# Altium PCB Handheld Logger Bud HH3642 rev2.PcbDoc (part 1 of 2)
Units mil, origin at the board's own origin, x right, y up, seen from the top; angles counter-clockwise.
Board outline 2140 x 3050 mil, 2 copper layers (Top Layer, Bottom Layer); 81 components, 89 nets, 390 pads, 239 vias.
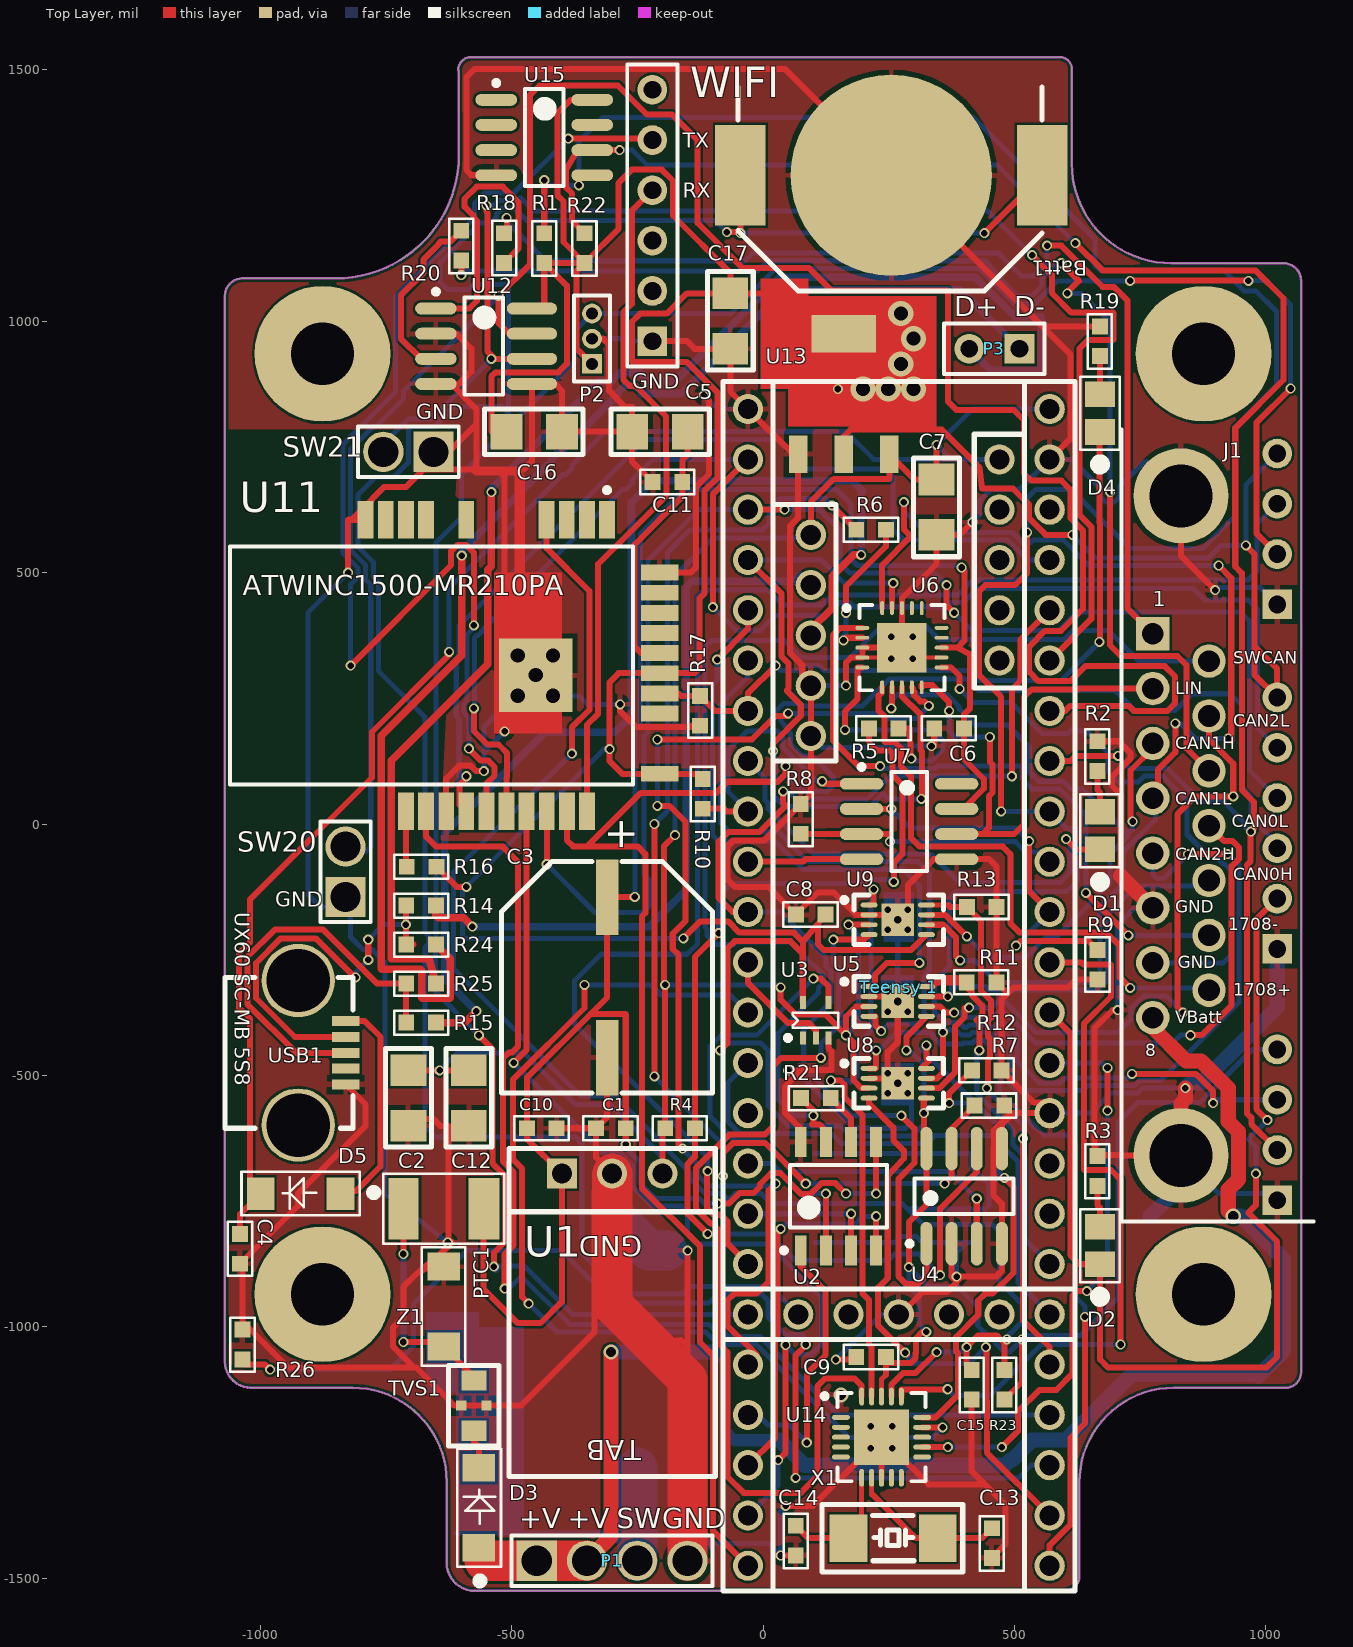
[diagram p0: Top Layer view]
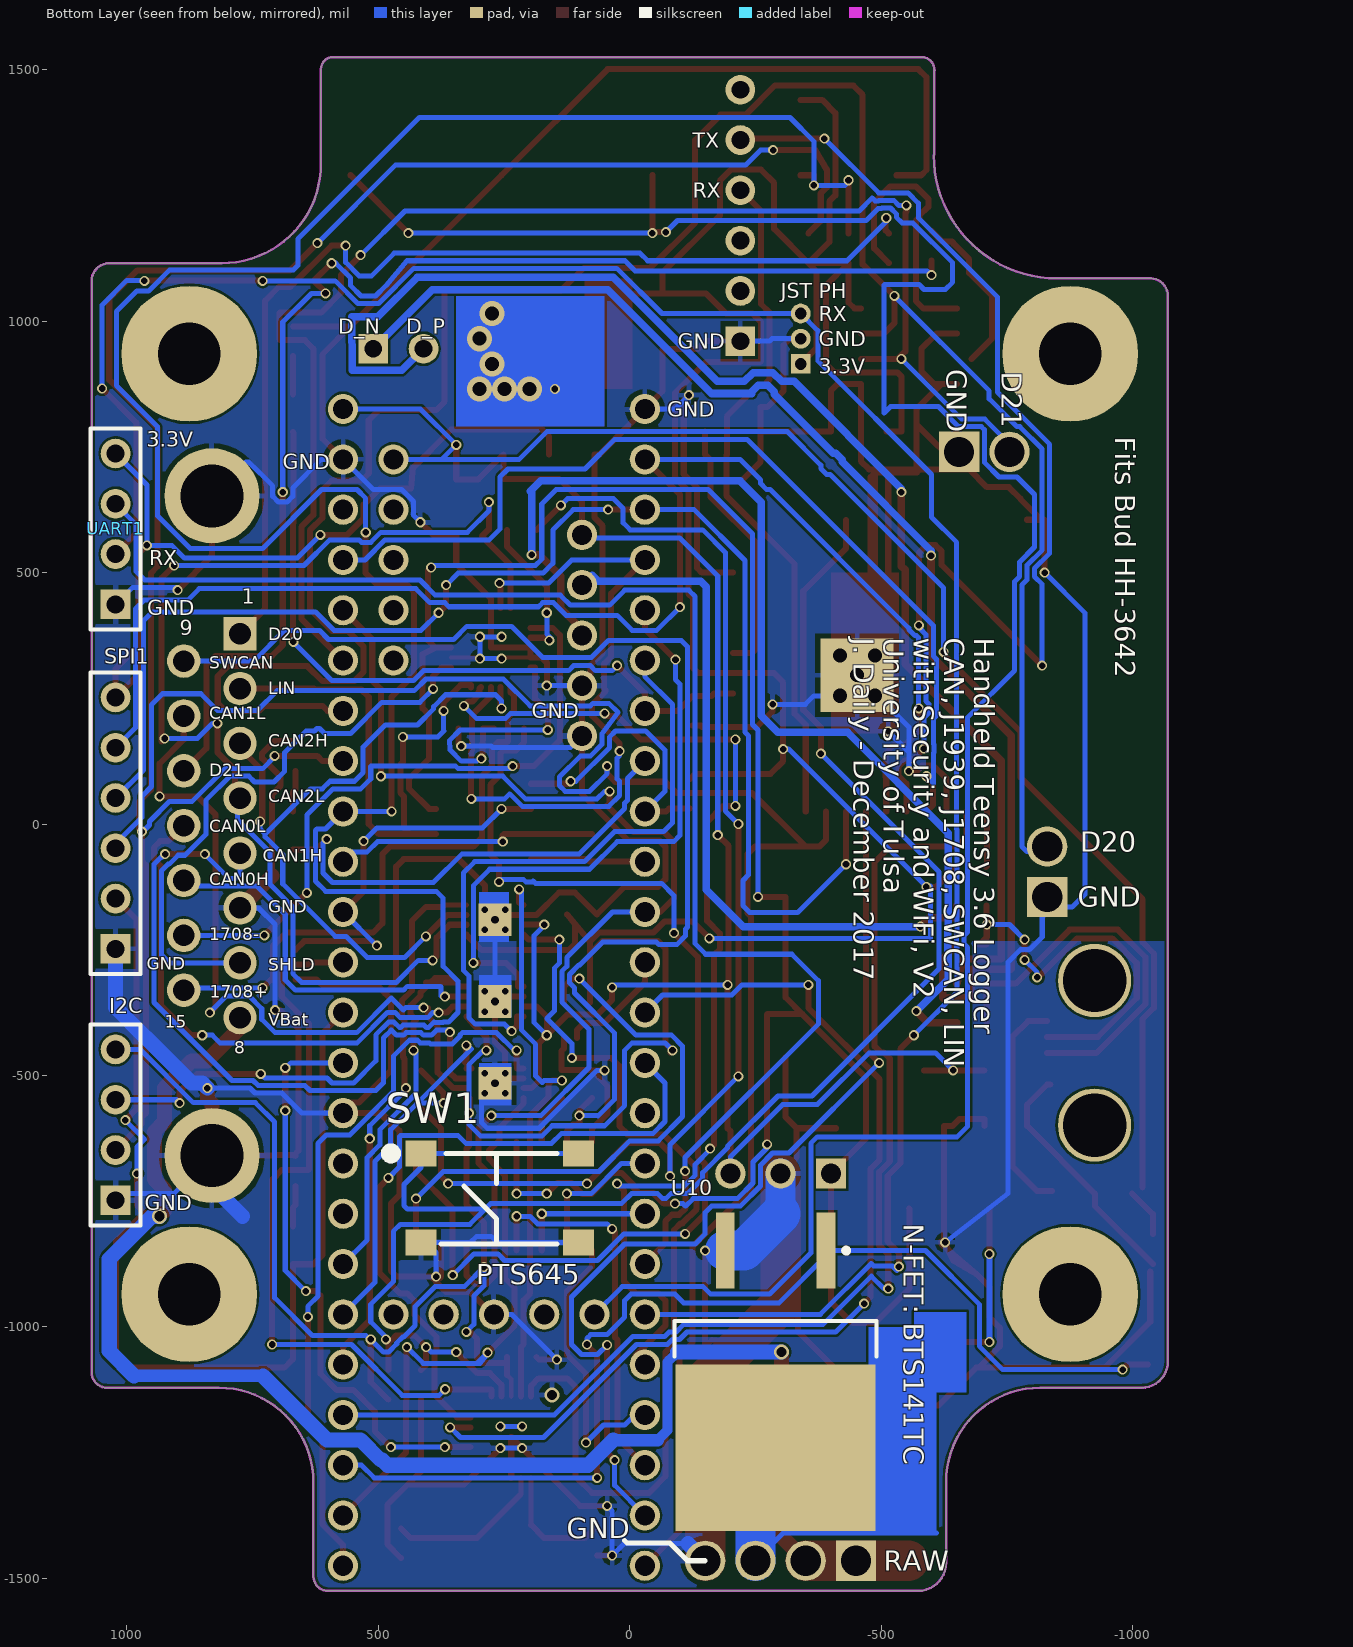
[diagram p1: Bottom Layer view, seen from below]

## Layer stack, top to bottom
Top Solder: solder mask 0.4, Solder Resist, Dk 3.5
Top Layer: signal copper 1.4
Dielectric 1: dielectric 12.6, FR-4, Dk 4.8
Bottom Layer: signal copper 1.4
Bottom Solder: solder mask 0.4, Solder Resist, Dk 3.5

## Board outline
-1018.02,-1121 -816.32,-1121 cw(c-816.32,-1308.32) -629,-1308.32 -629,-1469.09 ccw(c-573.09,-1469.09) -573.09,-1525 600,-1525 ccw(c600,-1496) 629,-1496 629,-1309 cw(c817,-1309) 817,-1121 1039,-1121 ccw(c1039,-1090) 1070,-1090 1070,1080 ccw(c1035,1080) 1035,1115 811.63,1115 cw(c811.63,1312.63) 614,1312.63 614,1501 ccw(c590,1501) 590,1525 -580,1525 ccw(c-580,1499) -606,1499 -605.24,1499.02 -605.09,1330.28 -604.64,1330.06 cw(c-849.7,1330.06) -849.7,1085 -1035,1085 ccw(c-1035,1050) -1070,1050 -1070,-1069.02 ccw(c-1018.02,-1069.02)

## Design rules (kind name [scope] priority, off if disabled: settings)
Clearance [All] p1: gap=5 ignorepadtopadclearanceinfootprint=FALSE
DiffPairsRouting [All] p1: maxlimit=10 minlimit=10 mostfreqgap=10 toplayer_minwidth=15 toplayer_maxwidth=15 toplayer_prefwidth=15 bottomlayer_minwidth=15 bottomlayer_maxwidth=15 bottomlayer_prefwidth=15 maxuncoupledlength=500
HoleSize [All] p1: absolutevalues=TRUE maxlimit=250 minlimit=13 maxpercent=80.000 minpercent=20.000
MinimumSolderMaskSliver [All] p1: minsoldermaskwidth=1
PolygonConnect [All] p1: connectstyle=Relief reliefconductorwidth=10 reliefentries=4 polygonreliefangle="90 Angle" airgapwidth=10
RoutingVias [All] p1: holewidth=13 width=20 viastyle="Through Hole" minholewidth=13 minwidth=20 maxholewidth=28 maxwidth=50
SMDNeckDown [All] p1: percent=200.000
SilkToSilkClearance [All] p1: silktosilkclearance=1
SilkToSolderMaskClearance [IsPad] p1: minsilkscreentomaskgap=1 clearancetoexposedcopper=TRUE
SolderMaskExpansion [All] p1: expansion=4
UnConnectedPin [All] p1 off:
Width [All] p1: maxlimit=120 minlimit=6 preferedwidth=12 bottomlayer_minwidth=10 bottomlayer_prefwidth=10 minimp=50.000000 maximp=50.000000 favimp=50.000000
25 further rules are at their usual default settings.

## Classes and differential pairs
component class "Teensy 3.6 with J1939 - Handheld Rev2": Batt1 C7 C9 C10 C13 C14 C15 D1 D2 D4 I2C P2 R2 R3 R8 R9 R10 R11 R12 R13 R18 R19 R20 R21 R23 SW1 SW20 SW21 "Teensy 1" U2 U5 U7 U8 U9 U12 U14 UART1 X1
component class "Additional Circuits - Handheld - Rev 2": C1 C2 C3 C4 C5 C6 C8 C11 C12 C16 C17 D3 D5 J1 P1 P3 PTC1 R1 R4 R5 R6 R7 R14 R15 R16 R17 R22 R24 R25 R26 SPI1 TVS1 U1 U3 U4 U6 U10 U11 U13 U15 USB1 WIFI Z1
differential pair "USB D": +"USB D_P" -"USB D_N"
differential pair "Hst USB": +"Hst USB_P" -"Hst USB_N"

## Components (designator, comment, footprint, x,y, rotation, side; value= is the part's Value field where it differs from the comment)
Batt1 "CR1225" "Battery Clip - CR1225" 255,1290 r180 top
C1 "0.1uF" 0603 -302.5,-605 r0 top
C2 "22uF" 1206 -705,-545 r90 top
C3 "100uF" "Elec. Cap - G" -310,-305 r90 top
C4 "10uF" 0603 -1040,-845 r270 top
C5 "10uF" 1206 -205,780 r0 top
C6 "0.1uF" 0603 370,190 r0 top
C7 "10uF" 1206 345,630 r270 top
C8 "0.1uF" 0603 95,-180 r0 top
C9 "0.1uF" 0603 215,-1060 r0 top
C10 "1uf" 0603 -440,-605 r0 top
C11 "0.1uF" 0603 -190,680 r0 top
C12 "22uF" 1206 -585,-545 r90 top
C13 "18pF" 0603 455,-1430 r90 top
C14 "18pF" 0603 65,-1425 r90 top
C15 "0.1uF" 0603 415,-1115 r90 top
C16 "22uF" 1206 -455,780 r180 top
C17 "22uF" 1206 -65,1000 r90 top
D1 "Green" "0805 Polarized" 670,-15 r90 top
D2 "Red" "0805 Polarized" 670,-840 r90 top
D3 "ACURA107-HF" "SMA with A and K" -565,-1439 r90 top
D4 "Yellow" "0805 Polarized" 670,815 r90 top
D5 "ACURA107-HF" "SMA with A and K" -840,-735 r180 top
I2C "Header 4" HDR1X4#1 1022.44,-748.31 r90 bottom
J1 "Vehicle Interface Cable Connector" DSUB1.385-2H15 1204.92,-3.31 r270 top locked
P1 "Header 4" HDR1X4#2 -450,-1465 r0 top
P2 "DNP GP-20U7 JST Header" MHDR1X3 -340,915 r90 top
P3 "Header 2" HDR1X2#1 510,945 r180 top
PTC1 "PTC RESTTBLE 0.75A" 1812 -635,-765 r0 top
R1 "4.7k" 0603 -435,1145 r90 top
R2 "330" 0603 665,135 r90 top
R3 "330" 0603 665,-690 r90 top
R4 "4.7k" 0603 -165,-605 r0 top
R5 "47" 0603 240,190 r0 top
R6 "47" 0603 215,585 r0 top
R7 "4.7k" 0603 450,-560 r0 top
R8 "100k" 0603 75,10 r90 top
R9 "100k" 0603 665,-280 r270 top
R10 "4.7k" 0603 -120,60 r90 top
R11 "100k" 0603 434.53,-315 r0 top
R12 "100k" 0603 445,-490 r0 top
R13 "100k" 0603 435,-165 r0 top
R14 "DNP" 0603 -680,-162.34 r180 top
R15 "DNP" 0603 -680,-395 r180 top
R16 "100k" 0603 -678.85,-85 r0 top
R17 "100k" 0603 -125,225 r270 top
R18 "330" 0603 -515,1145 r270 top
R19 "330" 0603 670,960 r90 top
R20 "330" 0603 -600,1150 r90 top
R21 "4.7k" 0603 105,-545 r180 top
R22 "4.7k" 0603 -355,1145 r90 top
R23 "100k" 0603 480,-1115 r90 top
R24 "47" 0603 -680,-239.89 r180 top
R25 "47" 0603 -680,-317.44 r180 top
R26 "100k" 0603 -1035,-1035 r90 top
SPI1 "Header 6" HDR1X6 1022.44,-248.31 r90 bottom
SW1 "PTS645" "Switch PTS645" 415,-655 r180 bottom
SW20 "Header 2" HDR1X2#2 -830,-145 r90 top
SW21 "Header 2" HDR1X2#2 -655,740 r180 top
"Teensy 1" "Teensy 3.6 Through Hole" "Teensy 3.6 Through Hole - No Labels" -30,-475 r0 top locked
TVS1 "Varistor 26V" Transfeed -575,-1206.5 r90 top
U1 "OKI-78SR" OKI-78SR -200,-695 r180 top locked
U2 "NCV7356D1R2G" ONSC-SOIC-8-751-07_V 150,-740 r90 top
U3 "74AHCT1G14" SOT-353 105,-390 r0 top
U4 "SN75HVD08DR" SOIC-SN8_N 400,-740 r90 top
U5 "MCP2558" TDFN 267.91,-352.97 r270 top
U6 "ADG1634BCPZ-REEL7" ADI-CP-20-4_N 276.26,350.63 r0 top locked
U7 "MCP2003A-E/SN" SOIC-SN8_N 290.51,5 r0 top
U8 "MCP2558" TDFN 267.91,-515.47 r270 top
U9 "MCP2558" TDFN 267.91,-190.47 r270 top
U10 "BTS141TC" INF-PG-TO263-3-2_N -290,-1088.43 r270 bottom
U11 "ATML-ATWINC1500-MR210PA-28" ATML-ATWINC1500-MR210PA-28_V -497.68,314.96 r270 top locked
U12 "MOCD207R2M" SOIC-8#1 -555,950 r0 top
U13 "NCP1117LPST33" SOT-223 70,735 r0 top
U14 "MCP2515-E/ML" QFN-ML20_M 235.63,-1219.29 r0 top
U15 "ATECC508A" SOIC-8#2 -435,1365 r0 top
UART1 "Header 4" HDR1X4#1 1022.44,436.69 r90 bottom
USB1 "UX60SC-MB-5S8" "USB Mini UX60S" -1070,-455 r270 top
WIFI "DNP" HDR1X6 -220,960 r90 top
X1 "16MHz" "XTAL 2 pad" 347.17,-1420 r180 top
Z1 "SMA6J" SMA -635,-880 r270 top

## Footprints (in the part's own frame and the unit in brackets; to place one, negate y for a bottom-side part, rotate by r counter-clockwise, add the part's x,y. Pads: shape width x height; smd on the part's side, far side on the other; paste and mask are expansions set on the pad)
0603 [mm] "0603 SMP Component with outline"
  rect 0.8x0.8 smd: 1(-0.75,0) 2(0.75,0)
  silkscreen extent -1.39,-0.61 1.36,0.61
"0805 Polarized" [mm] "Polarized 0805 with Pin 1 as Anode (+)"
  rect 1.3x1.5 smd: 1(-0.899,0) 2(1.001,0)
  silkscreen extent -2.79,-0.99 1.88,0.99
1206 [mm]
  rect 1.6x1.8 smd: 1(-1.4,0) 2(1.4,0)
  silkscreen extent -2.47,-1.16 2.5,1.15
1812 [mil] "Used for PTC Fuses from belfuse"
  rect 60x122 smd: 1(-80,0)
  rect 62x122 smd: 2(80,0)
  silkscreen extent -120,-70 120,70
ADI-CP-20-4_N [mm] "QFN, 20-Leads, Body 4x4mm, Pitch 0.5mm, Thermal Pad 2.5x2.5mm, IPC Medium Density"
  oval 0.7x0.2 smd: 1(-2,1) 2(-2,0.5) 3(-2,0) 4(-2,-0.5) 5(-2,-1) 11(2,-1) 12(2,-0.5) 13(2,0) 14(2,0.5) 15(2,1)
  oval 0.2x0.7 smd: 6(-1,-2) 7(-0.5,-2) 8(0,-2) 9(0.5,-2) 10(1,-2) 16(1,2) 17(0.5,2) 18(0,2) 19(-0.5,2) 20(-1,2)
  rect 2.5x2.5 smd: 21(0,0)
  silkscreen extent -2.92,-2.15 2.15,2.15, body extent -2,-2 2,2, height 1
ATML-ATWINC1500-MR210PA-28_V [mm] "Module, 28-Leads, Body 21.72x14.73mm, Pitch 1.016mm"
  rect 1.9x0.8 smd: 1(-7.365,4.761) 2(-7.365,3.745) 3(-7.365,2.729) 4(-7.365,1.713) 5(-7.365,-2.351) 6(-7.365,-4.383) 7(-7.365,-5.399) 8(-7.365,-6.415) 9(-7.365,-7.431) 10(7.365,-5.393) 11(7.365,-4.377) 12(7.365,-3.361) 13(7.365,-2.345) 14(7.365,-1.329) 15(7.365,-0.313) 16(7.365,0.703) 17(7.365,1.719) 18(7.365,2.735) 19(7.365,3.751)
  rect 0.8x1.9 smd: 20(5.465,7.431) 21(2.417,7.431) 22(1.401,7.431) 23(0.385,7.431) 24(-0.631,7.431) 25(-1.647,7.431) 26(-2.663,7.431) 27(-3.679,7.431) 28(-4.695,7.431)
  rect 3.7x3.7 hole 0.711: 29(0.485,1.161)
  silkscreen extent -8.99,-14.29 6.01,6.08, body extent -7.36,-14.29 7.36,7.43, height 3.35
"Battery Clip - CR1225" [mil] "Battery Holder Outlline for CR2032"
  rect 100x200 smd: 1(-300,0) 1(300,0)
  round 400 smd: 2(0,0)
  silkscreen extent -300,-175 305,230
DSUB1.385-2H15 [mm] "Connector; D Subminiature; 15 Position; Right Angle; Pitch 1.385 mm"
  rect 1.69x1.69 hole 1.09: 1(-9.695,-10.92)
  round 1.69 hole 1.09: 2(-6.925,-10.92) 3(-4.155,-10.92) 4(-1.385,-10.92) 5(1.385,-10.92) 6(4.155,-10.92) 7(6.925,-10.92) 8(9.695,-10.92) 9(-8.31,-8.08) 10(-5.54,-8.08) 11(-2.77,-8.08) 12(0,-8.08) 13(2.77,-8.08) 14(5.54,-8.08) 15(8.31,-8.08)
  round 4.8 hole 3.18: 16(-16.66,-9.5) 17(16.66,-9.5)
  silkscreen extent -20,-12.5 20,-2.79
"Elec. Cap - G" [mil] "Panasonic Style Electrolytic capacitor, Can size G, 10mm diameter"
  rect 150x45 smd: 1(159.45,0) 2(-159.45,0)
  silkscreen extent -229,-210 231,210
HDR1X2#1 [mm] "Connector; Header; 2 Position"
  rect 1.5x1.5 hole 0.9: 1(0,0)
  round 1.5 hole 0.9: 2(2.54,0)
  silkscreen extent -1.27,-1.27 3.81,1.27
HDR1X2#2 [mm] "Connector; Header; 2 Position"
  rect 2.032x2.032 hole 1.524: 1(0,0)
  round 2.032 hole 1.524: 2(2.54,0)
  silkscreen extent -1.27,-1.27 3.81,1.27
HDR1X4#1 [mm] "Connector; Header; 4 Position"
  rect 1.5x1.5 hole 0.9: 1(0,0)
  round 1.5 hole 0.9: 2(2.54,0) 3(5.08,0) 4(7.62,0)
  silkscreen extent -1.27,-1.27 8.89,1.27
HDR1X4#2 [mm] "Connector; Header; 4 Position"
  rect 2.032x2.032 hole 1.524: 1(0,0)
  round 2.032 hole 1.524: 2(2.54,0) 3(5.08,0) 4(7.62,0)
  silkscreen extent -1.27,-1.27 8.89,1.27
HDR1X6 [mm] "Connector; Header; 6 Position"
  rect 1.5x1.5 hole 0.9: 1(0,0)
  round 1.5 hole 0.9: 2(2.54,0) 3(5.08,0) 4(7.62,0) 5(10.16,0) 6(12.7,0)
  silkscreen extent -1.27,-1.27 13.97,1.27
INF-PG-TO263-3-2_N [mm] "DPAK, 3-Leads, Body 10x9.25mm, Pitch 2.54mm, IPC Medium Density"
  rect 3.85x0.95 smd: 1(-6.1,2.54) 3(-6.1,-2.54)
  rect 8.4x10.1 smd: 2(3.85,0)
  silkscreen extent -6.22,-5.1 -0.75,5.1, body extent -2.55,-5.1 6.9,5.1, height 4.4
MHDR1X3 [mm] "Connector; Header; 3 Position"
  rect 1x1 hole 0.6: 1(0,0)
  round 1 hole 0.6: 2(1.27,0) 3(2.54,0)
  silkscreen extent -0.9,-0.9 3.44,0.9
OKI-78SR [mil] "Horizontal Mount SIP DC/DC Converter"
  rect 60x60 hole 40: 1(200,0)
  round 60 hole 40: 2(100,0) 3(0,0)
  silkscreen extent -105,-50 305,602
ONSC-SOIC-8-751-07_V [mm] "SOIC, 8-Leads, Body 4.9x3.9mm, Pitch 1.27mm"
  rect 1.52x0.6 smd: 1(-2.74,1.905) 2(-2.74,0.635) 3(-2.74,-0.635) 4(-2.74,-1.905) 5(2.74,-1.905) 6(2.74,-0.635) 7(2.74,0.635) 8(2.74,1.905)
  silkscreen extent -2.86,-2.45 1.58,2.88, body extent -1.95,-2.45 1.95,2.45, height 1.75
QFN-ML20_M [mm] "QFN, 20-Leads, Body 4x4mm, Pitch 0.5mm, Thermal Pad 2.8x2.8mm, IPC Low Density"
  oval 0.9x0.25 smd: 1(-2.05,1) 2(-2.05,0.5) 3(-2.05,0) 4(-2.05,-0.5) 5(-2.05,-1) 11(2.05,-1) 12(2.05,-0.5) 13(2.05,0) 14(2.05,0.5) 15(2.05,1)
  oval 0.25x0.9 smd: 6(-1,-2.05) 7(-0.5,-2.05) 8(0,-2.05) 9(0.5,-2.05) 10(1,-2.05) 16(1,2.05) 17(0.5,2.05) 18(0,2.05) 19(-0.5,2.05) 20(-1,2.05)
  rect 2.8x2.8 smd: 21(0,0)
  silkscreen extent -3,-2.23 2.22,2.23, body extent -2.06,-2.09 2.09,2.06, height 1
SMA [mil] "SMA with outline"
  rect 55x65 smd: 1(0,0) 2(159,0)
  silkscreen extent -38,-44 197,43
"SMA with A and K" [mil] "SMA with outline and Cathode Bar on Pin 2"
  rect 55x65 smd: 1(0,0) 2(159,0)
  silkscreen extent -71,-44 197,43
SOIC-8#1 [mm]
  oval 2.1x0.6 smd: 1(-2.425,1.905) 2(-2.425,0.635) 3(-2.425,-0.635) 4(-2.425,-1.905)
  oval 2.54x0.6 smd: 5(2.425,-1.905) 6(2.425,-0.635) 7(2.425,0.635) 8(2.425,1.905)
  silkscreen extent -2.55,-2.45 0.98,2.88
SOIC-8#2 [mm]
  oval 2.1x0.6 smd: 1(-2.425,1.905) 2(-2.425,0.635) 3(-2.425,-0.635) 4(-2.425,-1.905) 5(2.425,-1.905) 6(2.425,-0.635) 7(2.425,0.635) 8(2.425,1.905)
  silkscreen extent -2.55,-2.45 0.98,2.88
SOIC-SN8_N [mm] "SOIC, 8-Leads, Body 4.9x3.8mm, Pitch 1.27mm, IPC Medium Density"
  oval 2.2x0.6 smd: 1(-2.4,1.905) 2(-2.4,0.635) 3(-2.4,-0.635) 4(-2.4,-1.905) 5(2.4,-1.905) 6(2.4,-0.635) 7(2.4,0.635) 8(2.4,1.905)
  silkscreen extent -2.52,-2.5 0.9,2.88, body extent -2,-2.5 2,2.5, height 1.75
SOT-223 [mm]
  rect 0.95x1.9 smd: 1(0,0) 2(2.3,0) 3(4.6,0)
  rect 3.25x1.9 smd: 4(2.3,6.1)
SOT-353 [mil]
  rect 12x26 smd: 1(-25.59,-35.43) 2(0,-35.43) 3(25.59,-35.43) 4(25.59,35.43) 6(-25.59,35.43)
  silkscreen extent -61,-40 44,15
"Switch PTS645" [mm]
  rect 1.55x1.3 smd: 1(0,0) 2(7.95,0) 3(0,-4.5) 4(7.95,-4.5)
  silkscreen extent -1.78,-4.57 6.86,0.25
TDFN [mm] "8-Lead Plastic Dual Flat, No Lead Package (MN) – 2x3x0.75mm Body [TDFN]"
  rect 1.651x1.651 hole 0.381: 0(0,0)
  oval 0.25x0.85 smd: 1(-0.75,-1.45) 2(-0.25,-1.45) 3(0.25,-1.45) 4(0.75,-1.45) 5(0.75,1.45) 6(0.25,1.45) 7(-0.25,1.45) 8(-0.75,1.45)
  silkscreen extent -1.25,-2.83 1.25,2.3
"Teensy 3.6 Through Hole - No Labels" [mil] "32 bit Arduino Compatible Microcontroller www.pjrc.com/teensy"
  round 60 hole 40: 0(500,1100) 1(0,0) 2(0,100) 3(0,200) 4(0,300) 5(0,400) 6(0,500) 7(0,600) 8(0,700) 9(0,800) 10(0,900) 11(0,1000) 12(0,1100) 13(0,1200) 14(0,1300) 15(100,-500) 16(0,-100) 17(300,-500) 18(400,-500) 19(600,-300) 20(600,0) 21(600,100) 22(600,200) 23(600,300) 24(600,400) 25(600,500) 26(600,600) 27(600,700) 28(600,800) 29(600,900) 30(600,1000) 31(600,1100) 32(600,1200) 33(600,1300) 34(500,1200) 35(500,1000) 36(500,900) 37(500,800) 38(0,-200) 39(0,-300) 40(0,-400) 41(0,-500) 42(0,-600) 43(0,-700) 44(0,-800) 45(0,-900) 46(0,-1000) 47(600,-1000) 48(600,-900) 49(600,-600) 50(600,-500) 51(600,-400) 61(600,-200) 62(600,-800) 63(600,-700) 75(125,1050) 76(125,950) 77(125,850) 78(125,750) 79(125,650) 88(500,-500) 90(600,-100) 91(200,-500)
  silkscreen extent -50,-1050 650,1355
Transfeed [mil] "AVX Multilayer Ceramic Transient Voltage Suppressors"
  rect 40x50 smd: 1(0,0) 2(100,0)
  rect 20x20 smd: 3(50,-25) 3(50,25)
  silkscreen extent -30,-50 130,50
"USB Mini UX60S" [mm] "Receptacle - Standard - Shell through Hole"
  round 3.7 hole 3.2: 0(-3.65,3.7) 0(3.65,3.7)
  rect 0.5x1.4 smd: 1(-1.6,6.1) 2(-0.8,6.1) 3(0,6.1) 4(1.6,6.1) 5(0.8,6.1)
  silkscreen extent -3.81,0 3.81,6.48
"XTAL 2 pad" [mm] "Digikey XC1659CT-ND"
  rect 1.9x2.4 smd: 1(0,0) 2(4.5,0)
  silkscreen extent -1.27,-1.7 5.84,1.7

## Part data
Batt1: library part "CR2032 Battery Holder", "Lithium Battery Non-Rechargeable (Primary) 3V Coin, 12.5mm", Manufacturer=Linx, PartNumber=BAT-HLD-012-SMT, Supplier Part Number 1=BAT-HLD-012-SMT-ND, Supplier 1=Digi-Key
C1 C9 C11: library part Cap, "CAP CER 0.1UF 50V X7R 0603", Manufacturer="Murata Electronics North America", PartNumber=GRM188R71H104KA93D, Supplier Part Number 1=490-1519-1-ND, Supplier 1=Digi-Key
C2 C12 C16 C17: library part Cap, "22µF ±20% 25V Ceramic Capacitor X5R 1206 (3216 Metric)", Manufacturer="Murata Electronics North America", PartNumber=GRT31CR61E226ME01L, Supplier Part Number 1=490-12451-1-ND, Supplier 1=Digi-Key
C3: library part "Tantalum Cap_1", "Aluminum Electrolytic Capacitors Radial, Can - SMD 5000 Hrs @ 105°C", Manufacturer="Panasonic Electronic Components", PartNumber=EEE-HC1H101P, Supplier Part Number 1=P19732CT-ND, Supplier 1=Digi-Key
C4: library part Cap, "10µF ±20% 25V Ceramic Capacitor X5R 0603 (1608 Metric)", Manufacturer="Murata Electronics North America", PartNumber=GRT188R61E106ME13D, Supplier Part Number 1=490-12323-1-ND, Supplier 1=Digi-Key
C5 C7: library part Cap, "10µF ±20% 50V Ceramic Capacitor X5R 1206 (3216 Metric)", Manufacturer="Murata Electronics North America", PartNumber=GRT31CR61H106ME01L, Supplier Part Number 1=490-12457-1-ND, Supplier 1=Digi-Key
C6 C8 C15: library part Cap, "CAP CER 0.1UF 50V 10% X7R 0603", Manufacturer="Murata Electronics North America", PartNumber=GRM188R71H104KA93D, Supplier Part Number 1=490-1519-1-ND, Supplier 1=Digi-Key
C10: library part Cap, "1µF ±20% 50V Ceramic Capacitor X5R 0603 (1608 Metric)", Manufacturer="Murata Electronics North America", PartNumber=GRT188R61H105ME13D, Supplier Part Number 1=490-12331-1-ND, Supplier 1=Digi-Key
C13 C14: library part Cap, "CAP CER 18PF 50V 5% NP0 0603", Manufacturer=Kemet, PartNumber=C0603C180J5GACTU, Supplier Part Number 1=399-1052-1-ND, Supplier 1=Digi-Key
D1: library part "LED - SMD", "LED GREEN DIFFUSED 0805 SMD", Manufacturer="OSRAM Opto Semiconductors Inc.", PartNumber="LG R971-KN-1", Supplier Part Number 1=475-1410-1-ND, Supplier 1=Digi-Key
D2: library part "LED - SMD", "LED RED DIFFUSED 0805 SMD", Manufacturer="OSRAM Opto Semiconductors Inc.", PartNumber="LS R976-NR-1", Supplier Part Number 1=475-1278-1-ND, Supplier 1=Digi-Key
D3 D5: library part "Schottky Diode", "Diode Schottky 1000V 1A Surface Mount DO-214AC (SMA)", Manufacturer="Comchip Technology", Supplier Part Number 1=641-1884-1-ND, PartNumber=ACURA107-HF, Supplier 1=Digi-Key
D4: library part "LED - SMD", "LED YELLOW DIFFUSED 0805 SMD", Manufacturer="OSRAM Opto Semiconductors Inc.", PartNumber="LY R976-PS-36", Supplier Part Number 1=475-2560-1-ND, Supplier 1=Digi-Key
I2C P1 UART1: "Header, 4-Pin"
J1: library part "D Connector 15", "Receptacle Assembly, 15 Position, Right Angle", Manufacturer="Amphenol FCI", PartNumber=D15S33E4GV00LF, Supplier Part Number 1=609-1498-ND, Supplier 1=Digi-Key
P2: library part MHDR1X3, "CONN HEADER PH SIDE 3POS 2MM SMD", Manufacturer=JST, PartNumber=S3B-PH-SM4-TB(LF)(SN), Supplier Part Number 1=455-1750-1-ND, Supplier 1=Digi-Key
P3 SW20 SW21: "Header, 2-Pin"
PTC1: library part PTC, "PTC RESTTBLE 0.75A 33V CHIP 1812", Manufacturer="Bel Fuse Inc.", PartNumber=0ZCG0075BF2B, Supplier Part Number 1=507-1765-1-ND, Supplier 1=Digi-Key
R1 R4 R7 R10 R21 R22: library part "Chip Resistor", "±1% 0.1W, 1/10W Chip Resistor 0603 (1608 Metric) Automotive AEC-Q200, High Voltage Thick Film", Manufacturer="Rohm Semiconductor", PartNumber=KTR03EZPF4701, Supplier Part Number 1=RHM4.7KAYCT-ND, Supplier 1=Digi-Key
R2 R3 R18 R19 R20: library part "Chip Resistor", "330 Ohms ±1% 0.1W, 1/10W Chip Resistor 0603 (1608 Metric) Automotive AEC-Q200, High Voltage Thick Film", Manufacturer="Rohm Semiconductor", PartNumber=KTR03EZPF3300, Supplier Part Number 1=RHM330AYCT-ND, Supplier 1=Digi-Key
R5 R6 R24 R25: library part "Chip Resistor", "±1% 0.1W, 1/10W Chip Resistor 0603 (1608 Metric) Automotive AEC-Q200, High Voltage Thick Film", Manufacturer="Rohm Semiconductor", PartNumber=KTR03EZPF47R0, Supplier Part Number 1=RHM47AYCT-ND, Supplier 1=Digi-Key
R8 R9 R11 R12 R13 R16 R17 R23 R26: library part "Chip Resistor", "±1% 0.1W, 1/10W Chip Resistor 0603 (1608 Metric) Automotive AEC-Q200, High Voltage Thick Film", Manufacturer="Rohm Semiconductor", PartNumber=KTR03EZPF1003, Supplier Part Number 1=RHM100KAYCT-ND, Supplier 1=Digi-Key
R14 R15: library part "Chip Resistor", "RES SMD 47 OHM 1% 1/10W 0603", Manufacturer="Panasonic Electronic Components", PartNumber=ERJ-3EKF47R0V, Supplier Part Number 1=P47.0HCT-ND, Supplier 1=Digi-Key
SPI1: "Header, 6-Pin"
SW1: library part "Switch - Tactile_1", "PTS645 Series  6 mm Tact Switches", Manufacturer="C & K Components", PartNumber="PTS645SM43SMTR92 LFS", Supplier Part Number 1=CKN9112CT-ND, Supplier 1=Digi-Key
"Teensy 1": "24 Position Header Connector 0.100\" (2.54mm) Through Hole Gold", Manufacturer="Sullins Connector Solutions", PartNumber=PPPC241LFBN-RC, Supplier Part Number 1=S7057-ND, Supplier 1=Digi-Key
TVS1: library part Transfeed, "34.5V 80A Varistor 1 Circuit Surface Mount 0805 (2012 Metric)", Manufacturer=AVX, PartNumber=V2AF126C600Y2EDP, Supplier Part Number 1=478-10038-1-ND, Supplier 1=Digi-Key
U1: library part 7805, "5V DC/DC Converter (7805 replacement)", Manufacturer="Murata Power Solutions Inc.", PartNumber=OKI-78SR-5/1.5-W36H-C, Supplier Part Number 1=811-2692-ND, Supplier 1=Digi-Key
U2: library part NCV7356D1G, "Single Wire CAN Transceiver, 5 to 27 V, 8-Pin SOIC, Pb-Free, Tube", Manufacturer="On Semiconductor", Supplier Part Number 1=NCV7356D1R2GOSCT-ND, PartNumber=NCV7356D1R2G, Supplier 1=Digi-Key
U3: library part "74AHCT1G14 Inverter", "IC SCHMIT-TRIGG INV GATE SOT353", Manufacturer="Diodes Incorporated", PartNumber=74AHCT1G14SE-7, Supplier Part Number 1=74AHCT1G14SE-7DICT-ND, Supplier 1=Digi-Key
U4: library part "SN75HVD12D (3.3v RS485)", "IC RS485 TXRX 3/5V 8-SOIC", Manufacturer="Texas Instruments", Supplier Part Number 1=296-37893-1-ND, PartNumber=SN75HVD08DR, Supplier 1=Digi-Key
U5 U8 U9: library part MCP2558FD, "Microchip CAN FD Transceiver with Silent Mode", Manufacturer=Microchip, PartNumber=MCP2558FDT-H/MNY, Supplier 1=Arrow, Supplier Part Number 1=MCP2558FDT-H/MNY
U6: "IC SWITCH QUAD SPDT 20LFCSP", Manufacturer="Analog Devices", Supplier Part Number 1=ADG1634BCPZ-REEL7CT-ND, PartNumber=ADG1634BCPZ-REEL7, Supplier 1=Digi-Key
U7: library part MCP2003AT-E/SN, "LIN J2602 Transceiver, 8-Pin SOIC, Extended Temperature, Tape and Reel", Manufacturer=Microchip, Supplier Part Number 1=MCP2003A-E/SN-ND, PartNumber=MCP2003A-E/SN, Supplier 1=Digi-Key
U10: "Smart Low-Side Power Switch HITFET, 60 V VDS, 12 A ID, -40 to 150 degC, PG-TO263-3-2, Reel, Green", Manufacturer=Infineon, Supplier Part Number 1=BTS141TCTR-ND, PartNumber=BTS141TC, Supplier 1=Digi-Key
U11: "SMARTCONNECT ATWINC1500B-MU-T MO", Manufacturer="Microchip Technologies", PartNumber=ATWINC1510-MR210PB1140, Supplier Part Number 1=ATWINC1510-MR210PB1140-ND, Supplier 1=Digi-Key
U12: library part "Optoisolator - Dual", "Optoisolator Transistor Output 2500Vrms 2 Channel 8-SO Tall", Manufacturer="Fairchild/ON Semiconductor", Supplier Part Number 1=MOCD207R2MCT-ND, PartNumber=MOCD207R2M, Supplier 1=Digi-Key
U13: library part "NCP1117 2.5V", "Linear Voltage Regulator IC Positive Fixed Output 3.3V 1A SOT-223", Manufacturer="On Semiconductor", PartNumber=NCP1117LPST33T3G, Supplier Part Number 1=NCP1117LPST33T3GOSCT-ND, Supplier 1=Digi-Key
U14: "CAN Controller CAN 2.0 SPI Interface 20-QFN (4x4)", Manufacturer=Microchip, Supplier Part Number 1=MCP2515-E/ML-ND, PartNumber=MCP2515-E/ML, Supplier 1=Digi-Key
U15: "Authentication Chip IC Networking and Communications 8-SOIC", Manufacturer="Microchip Technology", PartNumber=ATECC508A-SSHDA-T, Supplier Part Number 1=ATECC508A-SSHDA-TCT-ND, Supplier 1=Digi-Key
USB1: library part USB-Rugged, "USB - mini B USB 2.0 Receptacle Connector 5 Position Surface Mount, Right Angle; Through Hole", Manufacturer=Hirose, Supplier Part Number 1=H11589CT-ND, PartNumber=UX60SC-MB-5S8, Supplier 1=Digi-Key
WIFI: library part "Header 6", "CONN HEADER FEMALE 6POS .1\" GOLD", Manufacturer="Sullins Connector Solutions", PartNumber=PPPC061LFBN-RC, Supplier Part Number 1=S7039-ND, Supplier 1=Digi-Key
X1: library part "Crystal Oscillator", "CRYSTAL 16MHZ 18PF SMD", Manufacturer="TXC CORPORATION", PartNumber=7A-16.000MAAJ-T, Supplier Part Number 1=887-1086-1-ND, Supplier 1=Digi-Key
Z1: library part "Zener - Bidirectional", "TVS DIODE 20VWM 36.8VC SMA", Manufacturer="Micro Commercial Co", PartNumber=SMA6J24CA-TP, Supplier Part Number 1=SMA6J24CA-TPMSCT-ND, Supplier 1=Digi-Key

## Free pads (board coordinates)
  round 270 hole 125: 0(-876,-935) 0(-876,935) 0(876,-935) 0(876,935)

## Via types
v1: diameter 20, hole 13, Top Layer to Bottom Layer, 226 vias
v2: diameter 50, hole 28, Top Layer to Bottom Layer, 10 vias
v3: diameter 30, hole 20, Top Layer to Bottom Layer, 3 vias

## Nets (pads, with @x,y where several pads share a name; then routed paths per layer and width w, separated by ;. In a path a pad name is that pad's centre, name@x,y a point inside that pad or via, vN(x,y) a via of type N, cw(c..) or ccw(c..) an arc to the next point about the centre after c; other vN are vias at no path point)
3V3: C8.2 C9.2 C16.2 C17.2 I2C.4 P2.1 R1.1 R10.2 R16.2 R22.1 R23.1 SPI1.6 U3.6 U4.8 U5.5 U8.5 U9.5 U11.20 U11.23 U12.8 U13.2 U13.4 U14.18 U15.8 UART1.4 | length 10729.4
  Top Layer w9.84: U14.18@235.63,-1138.58 235.63,-1104 244.53,-1095.1
  Top Layer w10: v1(-85,-450) v1@-80,-455
  Top Layer w12: R16.2@-649.32,-85 -609.32,-125 v1(-590,-125) ; C16.2@-510.12,780 -540,780 -540,890 -532,898 -407,898 -390,915 -390,1070.47 R1.1@-435,1115.47 ; U12.8@-459.53,1025 -447,1025 -435,1037 R1.1@-435,1115.47 ; P2.1@-340,915 -371,946 -371,1099.47 R22.1@-355,1115.47 ; U15.8@-339.53,1440 -382.5,1440 -408.87,1413.63 -408.87,1250.19 -396.8,1238.12 -396.8,1157.27 R22.1@-355,1115.47 ; v1(-158.5,-227.5) -124.5,-193.5 -69.48,-193.5 -46.98,-216 61.5,-216 79.41,-233.91 ; R10.2@-120,89.53 -130.28,99.8 U11.20@-205.12,99.8 -279.8,99.8 -305,125 v1(-305,149) -305,281.8 -287,299.8 U11.23@-205.12,299.8 -136.2,299.8 -126,310 -126,448.7 -116.72,457.97 -116.72,662.32 -90.38,688.66 -90.38,857.38 -152,919 -259.53,919 -260.53,920 -260.53,999 -244.53,1015 -191.5,1015 -151.38,1055.12 C17.2@-65,1055.12 ; v1(-85,-450) -71,-436 -71,-247.5 -56.5,-233 54.5,-233 79.41,-257.91 ; U3.6@79.41,-354.57 79,-354.16 79,-258.32 79.41,-257.91 ; C8.2@124.53,-180 109,-198.55 ; v1(149,865) 230,784 ; U13.2@160.55,735 160.55,770.55 174,784 230,784 ; 160.55,900.55 U13.4@160.55,975.16 86.96,975.16 7,1055.12 C17.2@-65,1055.12 ; 244.53,-1095.1 C9.2@244.53,-1072 ; C9.2@244.53,-1060 C9.2@244.53,-1072 ; v1(285,-450) 285,-424 313,-396 U5.5@325,-382.5 ; v1(290,-881) 290,-792 325,-757 U4.8@325,-645.51 320,-640.51 v1(320,-575) 320,-550 U8.5@325,-545 319,-545 v1@319,-574 ; v1(325,-1010) 317,-1010 304,-1023 304,-1051.5 303.58,-1051.5 303.58,-1062.04 293.62,-1072 C9.2@244.53,-1072 ; U9.5@325,-220 294,-251 121.3,-251 109,-238.7 109,-198.55 ; R23.1@480,-1144.53 515,-1109.53 v1(515,-1025) ; v1(615,575) 562.02,575 529,608.02 529,635 497,667 435,667 430.73,708.77 355.5,784 230,784 ; v1(960,554) 977.04,536.96 977.04,354 ; R1.1@-435,1115.47 R22.1@-355,1115.47 ; R22.1@-355,1115.47 -287,1183.47 -287,1275 -261,1301 -201,1301 -179,1279 -179,1210 -65,1096 C17.2@-65,1055.12 ; 79.41,-257.91 79.41,-233.91 ; 79.41,-233.91 109,-198.55 ; 977.04,354 977.04,297.1 SPI1.6@1022.44,251.69 1022.44,308.6 977.04,354
  Bottom Layer w10: v1(-305,149) -316,149 v1(-590,-125) -596,-125 -598,-123 -598,-226.5 -597,-227.5 v1(-158.5,-227.5) ; v1(-85,-450) -70,-435 -5,-435 10,-450 10,-560 50,-600 154.11,-600 174.11,-620 297,-620 320,-597 v1(320,-575) ; v1(285,-450) 291,-450 320,-479 v1(320,-575) ; v1@319,-574 v1(320,-575) ; v1(325,-1010) 310,-995 310,-938.43 290,-918.43 v1(290,-881) 329,-920 387.29,-920 427,-959.71 427,-997.5 449.5,-1020 451.57,-1020 463.28,-1031.72 463.28,-1033.78 479.5,-1050 490,-1050 v1(515,-1025) 516.75,-1025 524.75,-1017 631.28,-1017 706,-942.28 706,-592.5 744.5,-554 867.72,-554 973.41,-448.31 I2C.4@1022.44,-448.31 ; v1(615,575) 661,529 885.63,529 910.63,554 v1(960,554) 960,674.25 UART1.4@1022.44,736.69
  other v2: 199,865 249,865 299,865 274,915 299,965 274,1015
5V0: "Teensy 1.33" "Teensy 1.34" "Teensy 1.75" C2.2 C4.1 C7.1 C12.2 D5.2 R4.1 U1.3 U5.3 U8.3 U9.3 U13.3 | length 6616
  Top Layer w12: C4.1@-1040,-815.47 -1040,-776 D5.2@-999,-735 ; D5.2@-1020,-722.83 -1020,-387.54 -1042.17,-365.38 -1042.17,-257.46 -1020,-235.29 -1020,-150 -777.5,92.5 -777.5,182.94 -624,336.44 v1(-624,342.1) ; C2.2@-705,-489.88 v1(-642.88,-489.88) C12.2@-585,-489.88 ; U1.3@-200,-695 -200,-610.47 R4.1@-194.53,-605 -194.69,-604.83 v1@-194.69,-322.75 ; v1(-194.69,-319.99) v1@-194.69,-322.75 ; v1(-175,-22) -196.5,-43.5 -196.5,-324.55 v1@-194.69,-322.75 ; v1(35,-325) 35,-349.59 63.98,-378.57 123.57,-378.57 v1(165,-420) ; 95,575 95,640.5 140.7,686.2 250,686.2 251.1,687.31 U13.3@251.1,735 300.98,685.12 C7.1@345,685.12 v1(345,754) ; v1(170,-200) 210.51,-200 U9.3@210.83,-200.31 ; U8.3@210.83,-525.31 195.31,-525.31 180,-510 180,-435 v1(165,-420) ; U5.3@210.83,-362.81 185,-362.81 165,-382.81 v1(165,-420)
  Bottom Layer w10: v1(-642.88,-489.88) -607.96,-454.96 -476,-454.96 -373.04,-557.92 -304.08,-557.92 -200,-662 U1.3@-200,-695 ; v1(-624,342.1) -624,469.51 -398.51,695 -391.72,695 -380,706.72 -380,713.51 -313.51,780 165,780 220,725 374,725 ; v1(-194.69,-319.99) -195,-320 30,-320 v1(35,-325) ; v1(-175,-22) -175,493.1 -99.1,569 89,569 95,575 ; v1(165,-420) 190,-395 190,-221.72 170,-201.72 v1(170,-200) ; 470,725 374,725 ; 570,825 416,825 v1(345,754) 374,725
A6: J1.1 R18.1 | length 2109
  Top Layer w12: R18.1@-515,1174.53 -509,1180.53 -509,1204 v1(-510,1205) ; v1(565,1150) 593,1150 675,1068 697.5,1068 725,1040.5 725,428.39 J1.1@775,378.39
  Bottom Layer w10: v1(-510,1205) -511,1205 -514,1202 -432,1120 -35.5,1120 -20.5,1135 468.28,1135 513.28,1090 538.28,1090 565,1116.72 v1(565,1150)
A7: J1.11 R20.1 | length 2533.1
  Top Layer w12: v1(-600,1091.5) R20.1@-600,1120.47 ; v1(593,1115) 628,1080 605,1057 v1(605,1055) ; v1(690,660) 690,355.5 711.5,334 824,334 842,316 842,150.56 J1.11@886.81,105.75
  Bottom Layer w10: v1(-600,1091.5) -591.5,1100 -10.5,1100 9.5,1120 442.57,1120 485,1070.5 505.5,1050 534.5,1050 555,1070.5 555,1085.5 584.5,1115 v1(593,1115) ; v1(605,1055) 633,1055 690,998 v1(690,660)
CAN0H: J1.13 U5.7 | length 750.2
  Top Layer w12: U5.7@325,-343.13 v1(367.62,-343.13)
  Bottom Layer w10: v1(367.62,-343.13) 373.87,-343.13 375,-342 375,-323.79 376,-322.79 442.26,-322.79 449.46,-330 665,-330 685,-310 685,-180 741.38,-123.62 875.55,-123.62 J1.13@886.81,-112.36
CAN0L: J1.12 U5.6 | length 1072.7
  Top Layer w12: U5.6@325,-362.81 352,-362.81 364.19,-375 v1(380,-375) ; v1(850,-420) 872,-420 932,-360 932,-84 946,-70 946,-46.3 933.7,-34 917.5,-34 J1.12@886.81,-3.31
  Bottom Layer w10: v1(380,-375) 391.72,-375 401.72,-385 456.35,-385 466.35,-375 481.92,-375 541.92,-435 815,-435 830,-420 v1(850,-420)
CAN0RX: "Teensy 1.9" U5.4 | length 1238.2
  Top Layer w12: U5.4@210.83,-382.5 224,-382.5 224,-401 v1(235,-412)
  Bottom Layer w10: -30,325 -30,293 -85,238 -85,2.5 -67.5,-15 30,-15 90,-75 308.5,-75 331,-97.5 331,-291 320,-302 320,-385 307,-398 249,-398 v1(235,-412)
CAN0TX: "Teensy 1.10" U5.1 | length 1216.1
  Top Layer w12: v1(-91,327) -30,388 -30,425 ; U5.1@210.83,-323.44 222.64,-323.44 222.64,-299.86 246.5,-276 v1(311,-276)
  Bottom Layer w10: v1(-91,327) -91,287 -100,278 -100,-22.5 -87.5,-35 25,-35 80,-90 278.5,-90 311,-122.5 v1(311,-276)
"CAN1 Switch": "Teensy 1.11" U6.8 U6.19 | length 1457.1
  Top Layer w12: -30,525 37,458 37,332.7 51,318.7 51,269.02 48,266.02 48,264.02 75,237.02 75,215 20,160 v1(20,145) ; U6.19@256.57,429.37 256.57,476.57 v1(259,479) ; U6.8@276.26,271.89 276.26,254.36 313.28,217.35 313.28,147.03 316,144.3 316,51 v1(315,50)
  Bottom Layer w10: -30,525 115.5,525 161.5,479 v1(259,479) ; v1(20,145) 20,136.15 25,131.15 25,90 20,85 20,56.72 41.72,35 213.71,35 238.71,60 248.71,50 v1(315,50)
CAN1H: J1.5 U8.7 | length 1415.7
  Top Layer w12: U8.7@325,-505.63 346.33,-505.63 357.69,-494.27 v1(357.69,-414) ; v1(845,-60) v1(924,-60)
  Bottom Layer w10: v1(357.69,-414) 361.69,-410 384.29,-410 394.29,-420 410.5,-420 415.5,-415 444.5,-415 449.5,-420 463.78,-420 473.78,-410 474.5,-410 490,-425.5 490,-515 505,-530 636,-530 646,-520 738.97,-520 748.97,-510 791,-510 946,-355 946,-80 v1@931,-65 ; J1.5@775,-57.83 775,-100 783.62,-108.62 796.38,-108.62 v1(845,-60) ; v1(924,-60) v1@931,-67
CAN1L: J1.10 U8.6 | length 1444.5
  Top Layer w12: U8.6@325,-525.31 350.69,-525.31 382,-494 382,-402.7 401,-383.7 401,-366.3 404.7,-370 409.7,-365 v1(410,-365) ; v1(835,-375) 824,-364 824,19 860,55 v1(935,55) 935,120.16 886.81,168.35 J1.10@886.81,214.8
  Bottom Layer w10: v1(410,-365) 445.14,-365 450.14,-370 474.14,-346 543.14,-415 705,-415 731.73,-388.27 731.73,-367.08 757.08,-341.73 801.73,-341.73 v1(835,-375)
CAN1RX: "Teensy 1.48" U8.4 | length 1187.4
  Top Layer w12: U8.4@210.83,-545 210.83,-555.83 258,-603 258.7,-603 259,-603.3 259,-628.7 280,-649.7 280,-665.31 248,-699.31 248,-903 229,-922 229,-997.42 v1(282.58,-1051) v1@286.58,-1055 ; v1(443.28,-1040) 444,-1040 445,-1250 570,-1375
  Bottom Layer w10: v1(443.28,-1040) 410.78,-1072.5 304.08,-1072.5 ; 304.08,-1072.5 v1(282.58,-1051) 282.58,-1054.16 285,-1056.58 297.5,-1072.5 304.08,-1072.5
CAN1TX: "Teensy 1.47" U8.1 | length 1475.7
  Top Layer w12: U8.1@210.83,-485.94 224,-485.94 224.41,-485.53 224.41,-478.42 225,-477.83 v1(225,-450) ; 570,-1475 570,-1434 611,-1393 611,-1221 640,-1192 v1(640,-980)
  Bottom Layer w10: v1(225,-450) 229.93,-450 264.93,-415 333,-415 337.69,-419.69 337.69,-422.28 352.4,-437 396.59,-437 398.59,-435 416.72,-435 421.72,-430 438.28,-430 470,-461.72 470,-531.57 532,-593.57 556.43,-618 603,-618 620,-635 620,-939 640,-959 v1(640,-980)
CAN2H: J1.3 U6.7 U9.7 | length 1458.9
  Top Layer w12: v1(255,230) 256.57,231.57 U6.7@256.57,271.89 ; U9.7@325,-180.63 362.63,-180.63 v1(405.39,-223.39) ; v1(735,5) 731.47,5 730.73,4.27 730.73,106.39 775,150.66 J1.3@775,160.28
  Bottom Layer w10: v1(255,230) 255,245 267,257 366.28,257 390,233.28 390,229 422,197 486,197 530,153 530,102.5 547.5,85 596.21,85 611.21,70 632.17,70 ; v1(405.39,-223.39) 447.5,-265.5 522,-265.5 564.11,-223.39 585.61,-223.39 690,-119 690,-60.43 725,-25.43 725,-20 ; 635,70 725,-20 ; v1(735,5) 735,-10 725,-20
CAN2H/J1708+: J1.15 U6.6 | length 1175.3
  Top Layer w12: U6.6@236.89,271.89 236.89,262 230,255.11 230,225.3 242,213.3 242,164.25 243,163.25 261.5,163.25 274,150.75 274,115 294,95 294,-27.5 311.5,-45 477,-45 492,-60 492,-197.5 510.5,-216 683,-216 709,-242 709,-305 v1(730,-326)
  Bottom Layer w10: v1(730,-326) 882.34,-326 J1.15@886.81,-330.47
CAN2L: J1.4 U6.20 U9.6 | length 2420
  Top Layer w12: U6.20@236.89,429.37 236.89,514.74 294,571.85 280,585.85 v1(280,640) ; U9.6@325,-200.31 358.27,-200.31 384,-226.04 384,-263 v1(392,-271) ; J1.4@775,51.22 785,61.22 785,107.67 820,142.67 v1(820,200) ; v1(906,514) 931.08,488.92 931.08,163.92 v1(925,170)
  Bottom Layer w10: v1(280,640) 280,623 323,580 495,580 515,560 533.28,560 538.28,565 596.72,565 647.72,514 v1(906,514) ; v1(392,-271) 420.46,-271 464.46,-315 652.5,-315 670,-297.5 670,-165 715.77,-119.23 715.77,-55.87 780,8.36 780,28.27 J1.4@775,33.27 ; J1.4@766.02,42.24 J1.4@775,33.27 ; J1.4@775,30 J1.4@775,33.27 ; J1.4@775,51.22 J1.4@775,33.27 ; v1(820,200) 830,200 860,170 v1(925,170)
CAN2L/J1708-: J1.14 U6.1 | length 1291
  Top Layer w12: U6.1@197.52,390 153.6,390 139,375.4 139,166.5 190.5,115 v1(233,115) ; v1(642,-137) v1(726.42,-221.42)
  Bottom Layer w10: v1(233,115) 238,110 341.21,110 346.21,115 514,115 515,114 515,90 535,70 590,70 642,18 v1(642,-137) ; v1(726.42,-221.42) J1.14@886.81,-221.42
CAN2RX: U9.4 U14.20 | length 1898.7
  Top Layer w12: v1(115,-465) 36.5,-465 20.3,-481.2 20.3,-600.7 4,-617 -66.4,-617 -133,-683.6 -133,-765.74 -104.74,-794 -101.3,-794 -88,-807.3 -88,-1033 -71,-1050 -71,-1297.5 -38.5,-1330 75,-1330 108,-1297 108,-1118.3 124,-1102.3 181.8,-1102.3 196.26,-1116.76 U14.20@196.26,-1138.58 ; v1(140,-230) 200.83,-230 U9.4@210.83,-220
  Bottom Layer w10: v1(115,-465) 115,-436.72 165,-386.72 150,-371.72 150,-286.79 140,-276.79 v1(140,-230)
CAN2TX: U9.1 U14.19 | length 1154.1
  Top Layer w12: v1(135,-510) 154,-510 162,-518 162,-543 198,-579 198,-934 211,-947 211,-1035 215.94,-1039.94 U14.19@215.94,-1138.58 ; U9.1@210.83,-160.94 215,-160.94 220,-155.94 v1(220,-130)
  Bottom Layer w10: v1(135,-510) 170,-510 174,-514 187,-501 187,-438 215,-410 215,-135 v1(220,-130)
DebugRX: U11.19 WIFI.4 | length 1366.5
  Top Layer w12: U11.19@-350,25 -350,197 -328,219 -328,517 -192,653 -192,734 -193,735 -193,810.63 -253.37,871 -265,871 -277.53,883.53 -277.53,1017.53 -261,1034.06 -261,1219 WIFI.4@-220,1260
DebugTX: U11.14 WIFI.5 | length 2386.1
  Top Layer w12: v1(-820,315) -620,515 -620,529.8 -620,542.5 -607.7,554.8 -590.3,554.8 -580.5,545 -575,539.5 v1(-575,395) ; v1(-585,150) -561,126 -546.3,126 -534,113.7 -534,96.3 -550,80.3 U11.14@-550,25 ; v1(-387.19,1362.81) -220,1362.81 WIFI.5@-220,1360
  Bottom Layer w10: v1(-820,315) -820,476.72 -805,491.72 -805,508.28 -835,538.28 -835,755 -731,859 -731,1048.21 -573.75,1205.46 -573.75,1234.54 -553.28,1255 -495,1255 v1(-387.19,1362.81) ; v1(-585,150) -585,211.72 -595,221.72 -595,238.28 -589,244.28 -589,376.58 v1@-575,390.58
  Bottom Layer w12: v1@-575,390.58 v1(-575,395)